# Altium PCB PCB1.PcbDoc
Units mm, origin at the board's own origin, x right, y up, seen from the top; angles counter-clockwise.
Board outline 50 x 50 mm, 2 copper layers (Top Layer, Bottom Layer), stack 1.671 mm thick; 54 components, 28 nets, 163 pads, 81 vias.
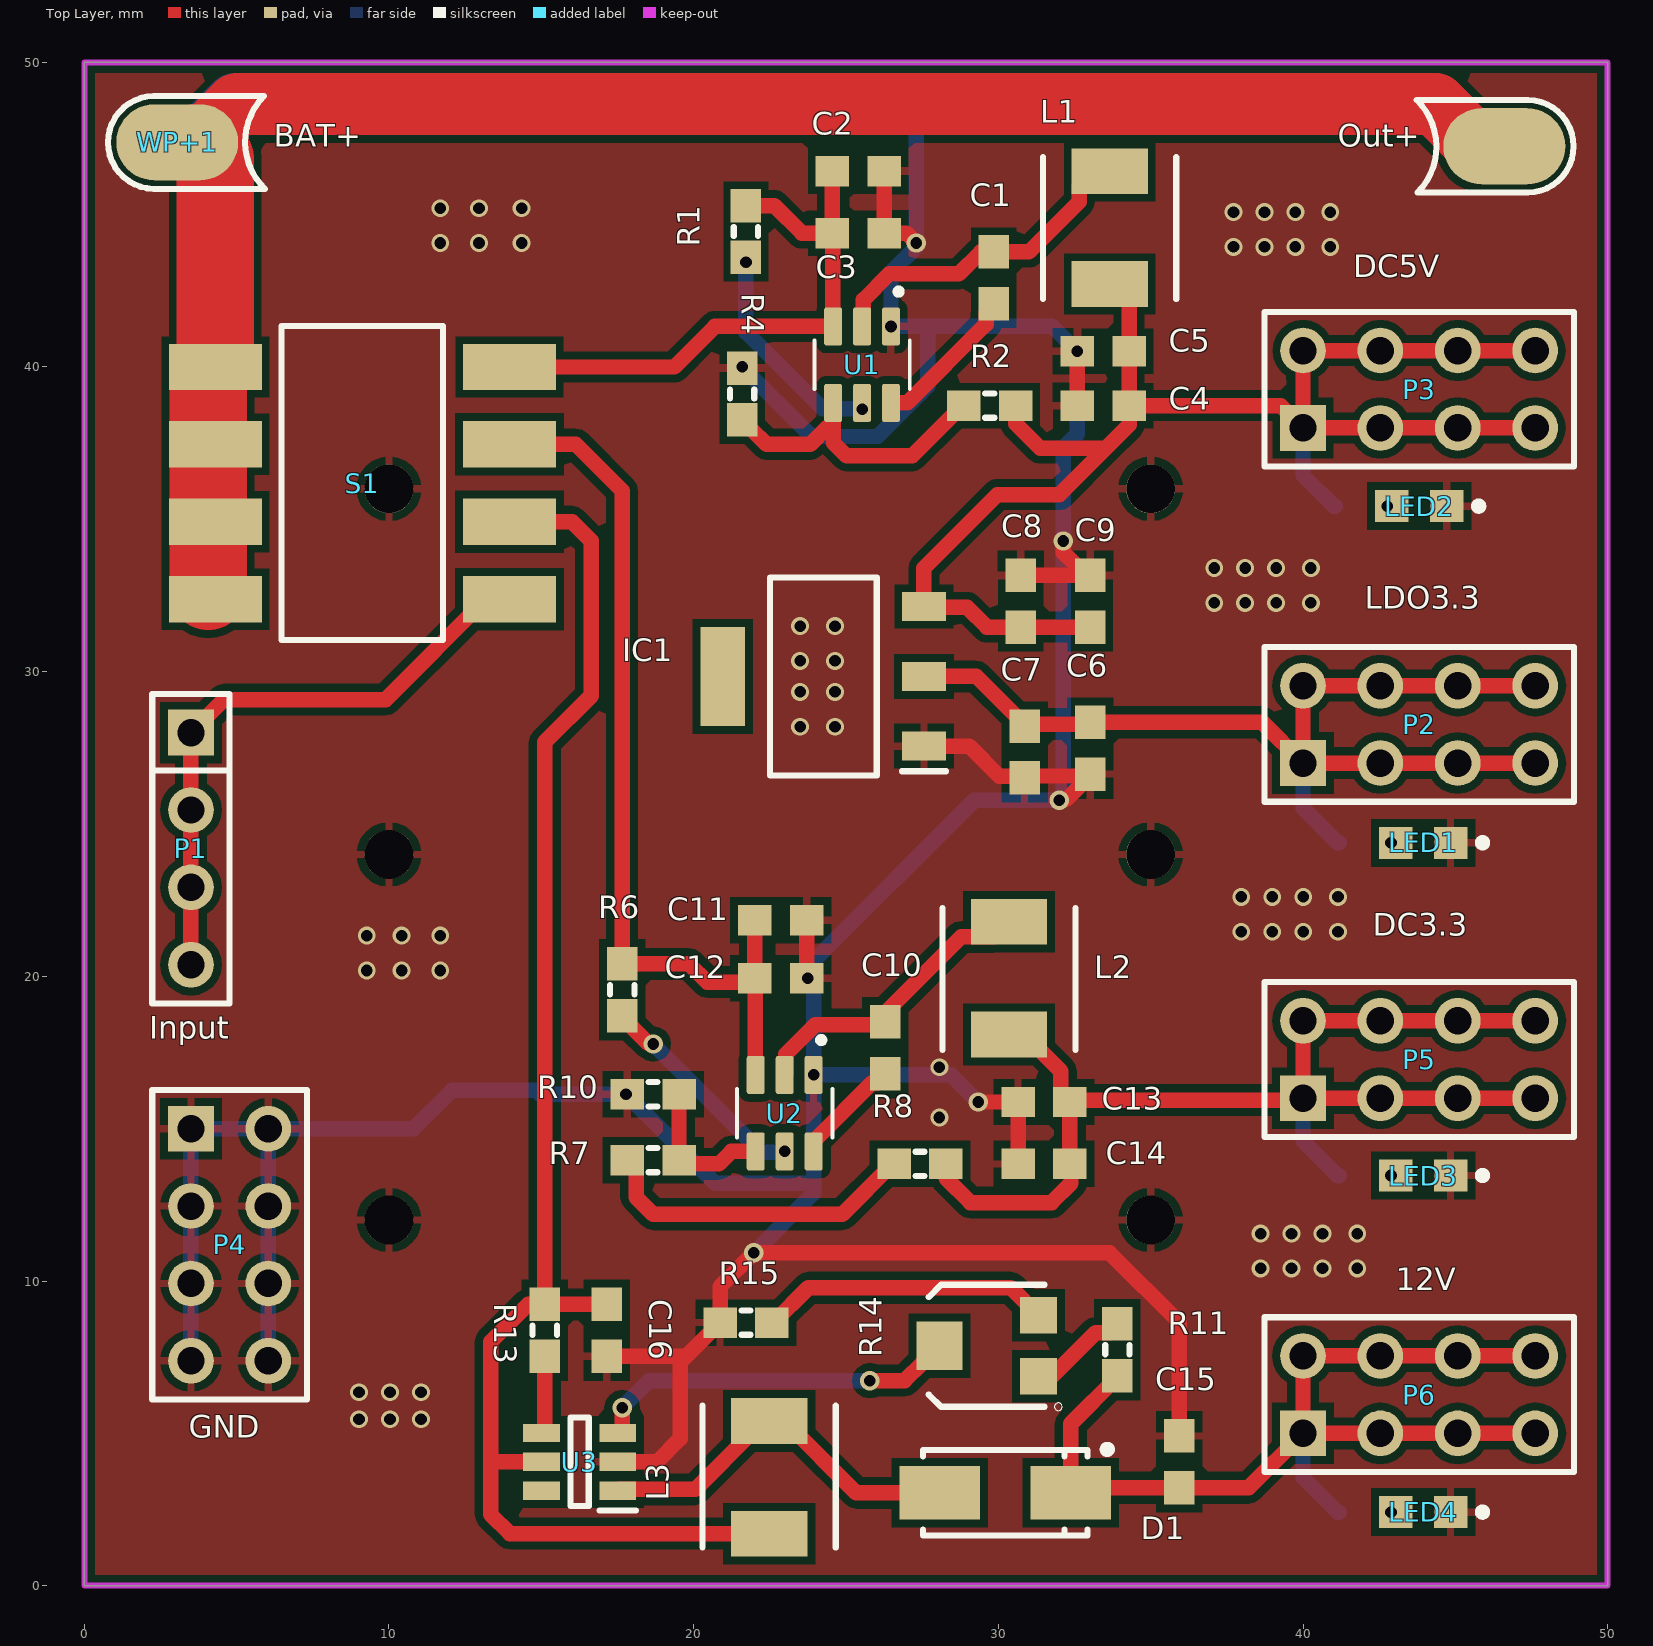
[diagram p0: Top Layer view]
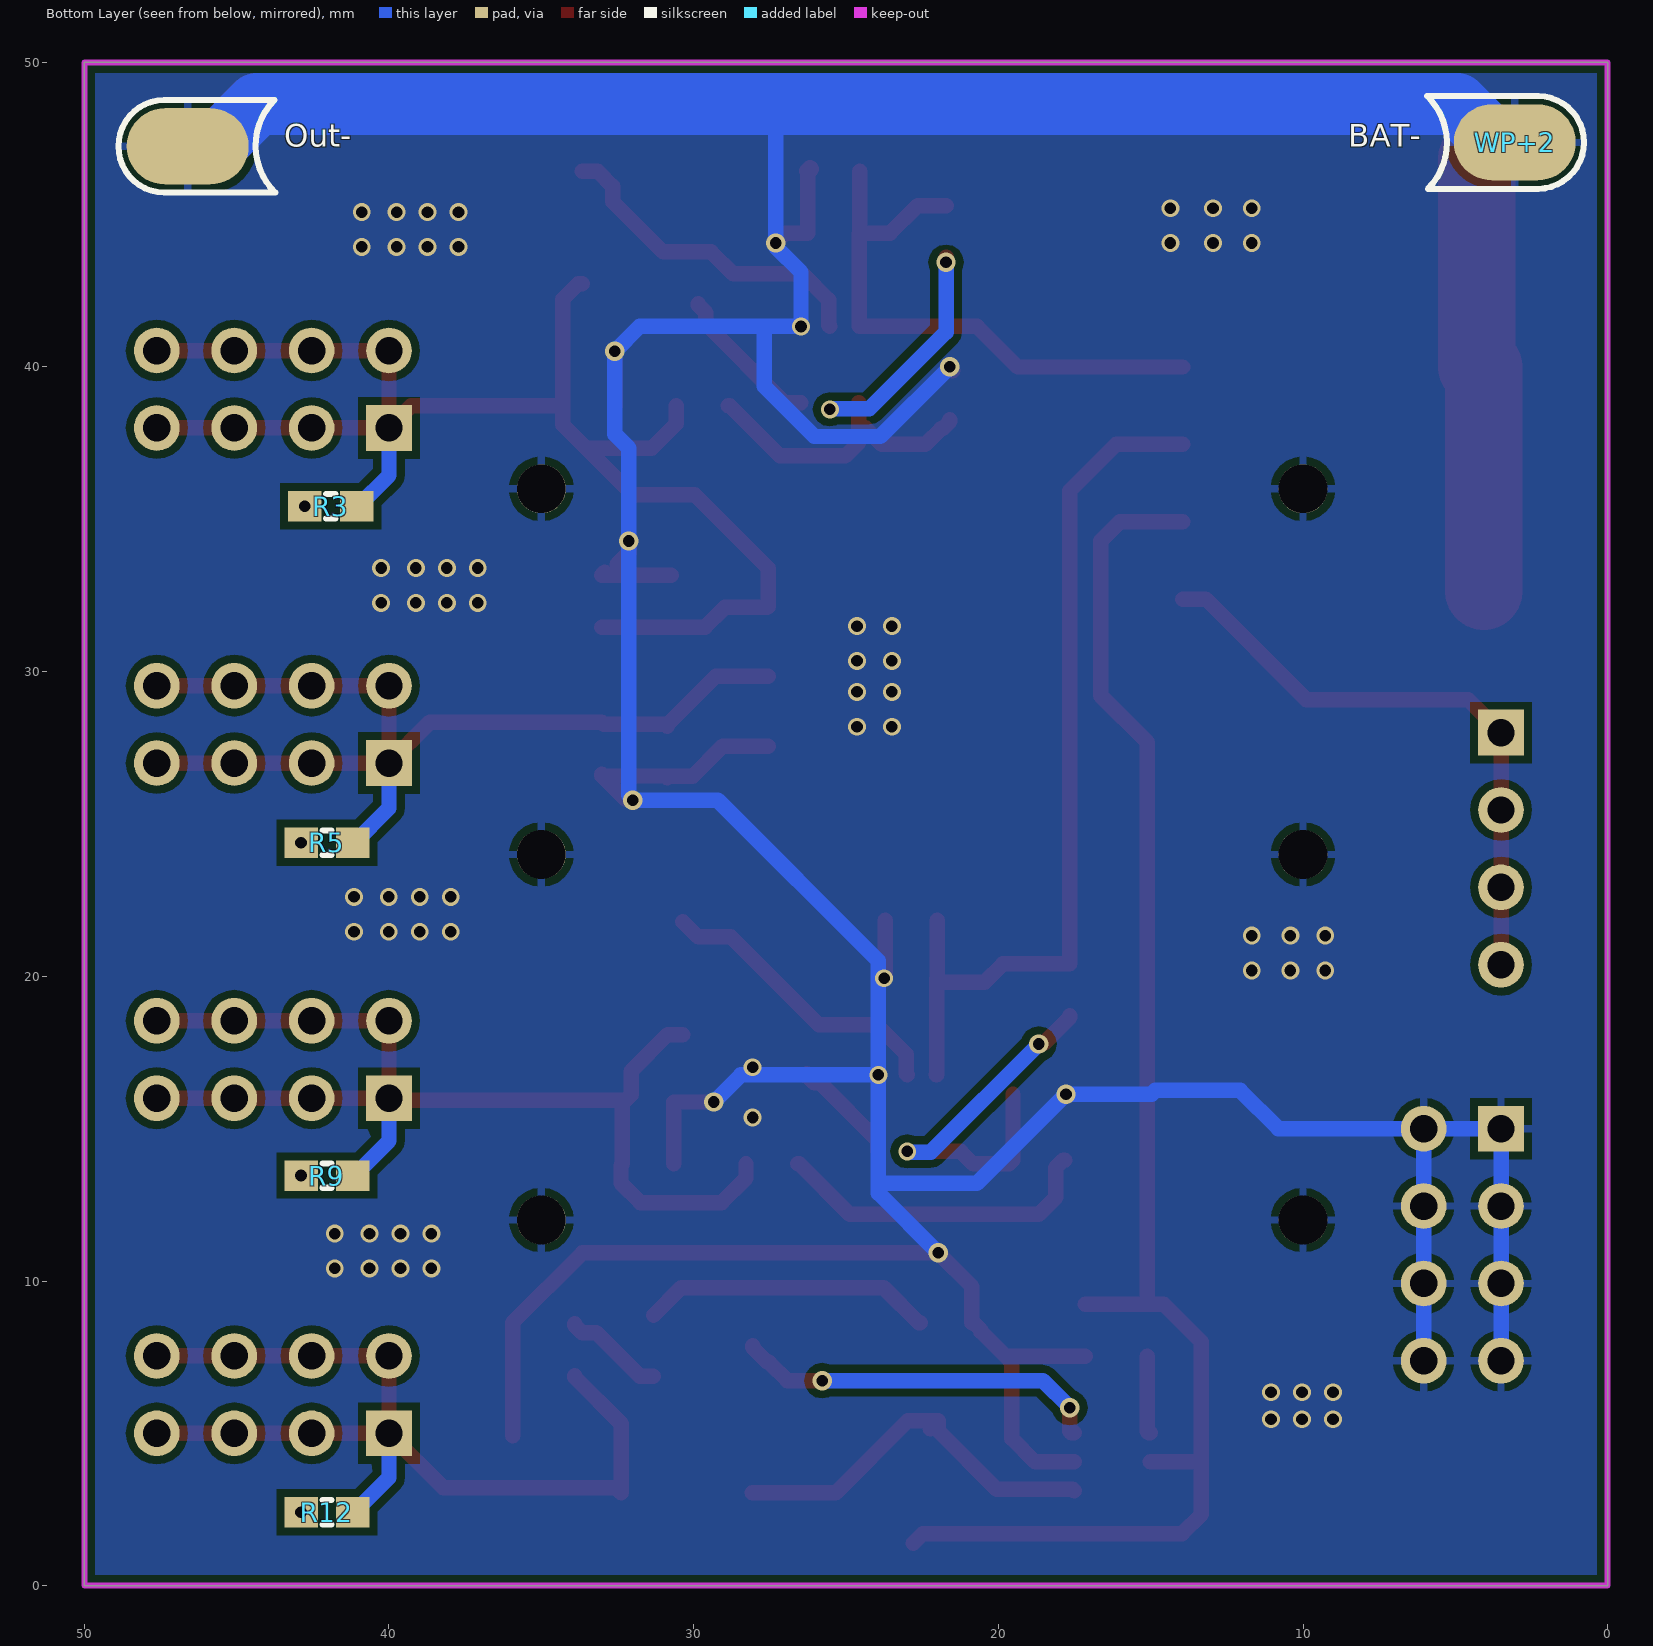
[diagram p1: Bottom Layer view, seen from below]
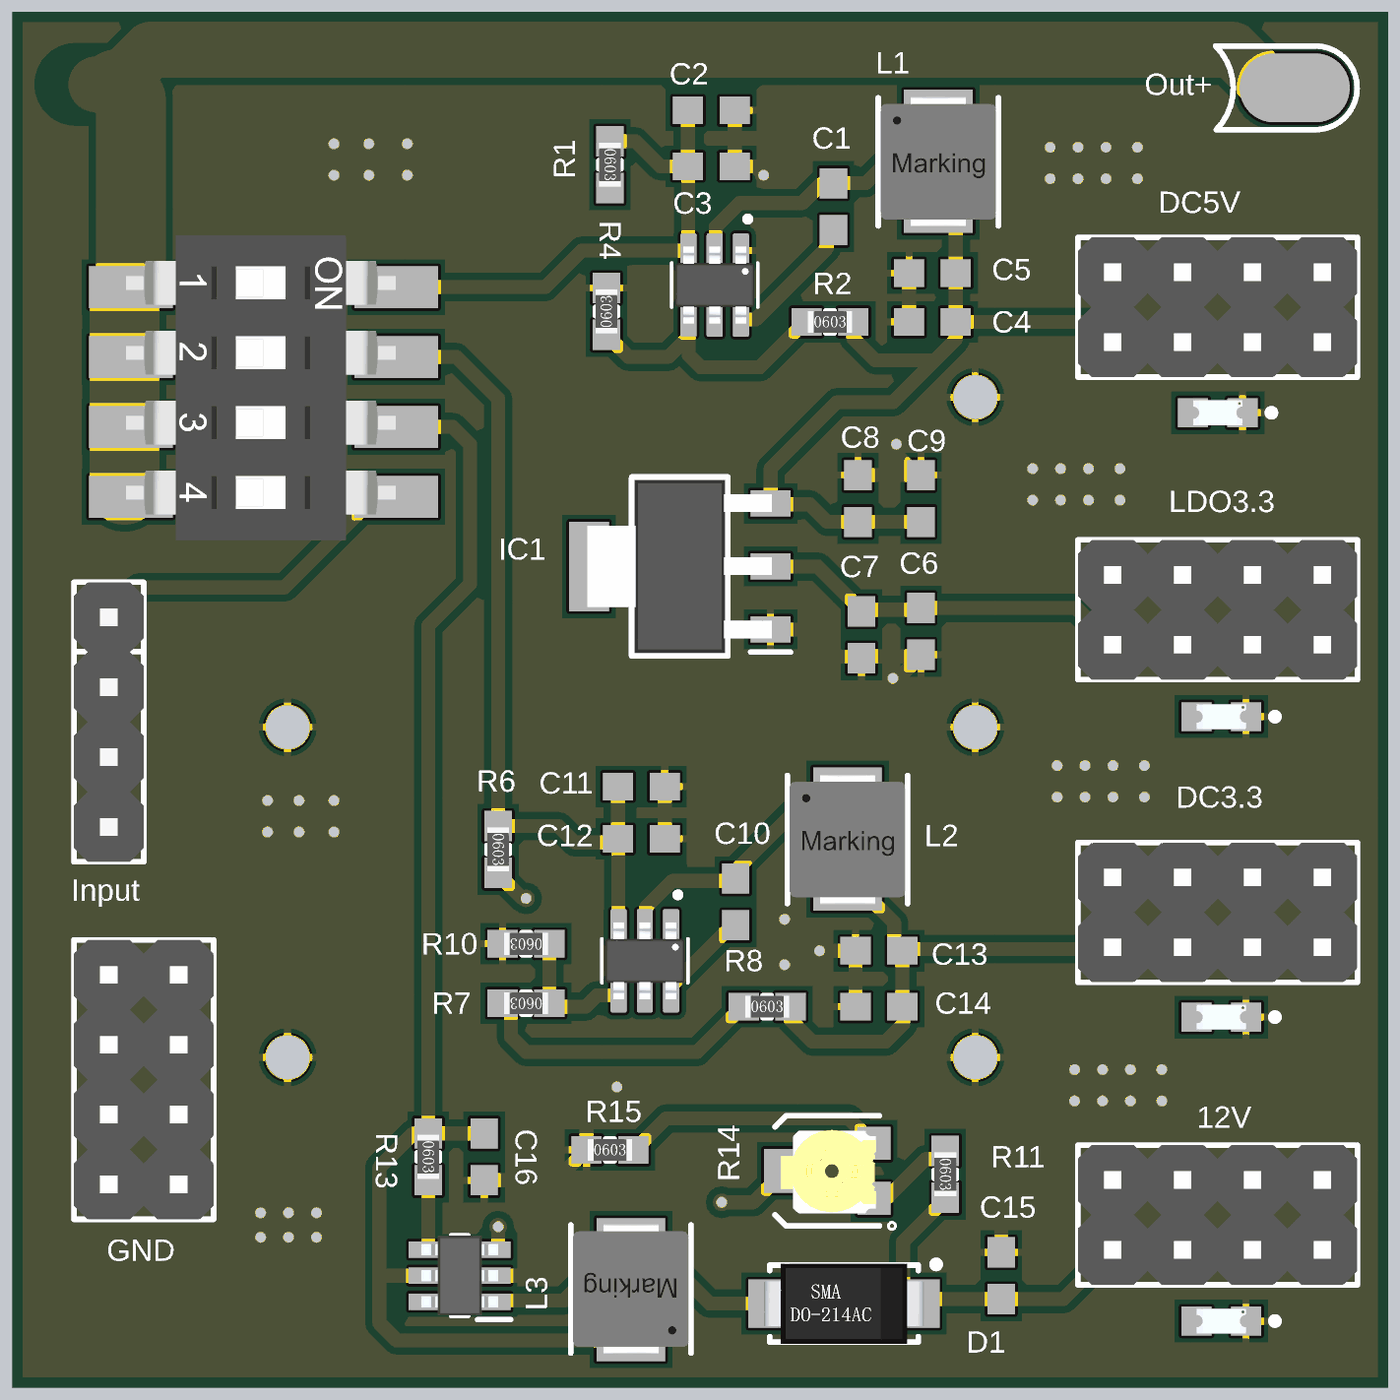
[diagram p2: 3D render of the assembled board from above, using the file's embedded part models]
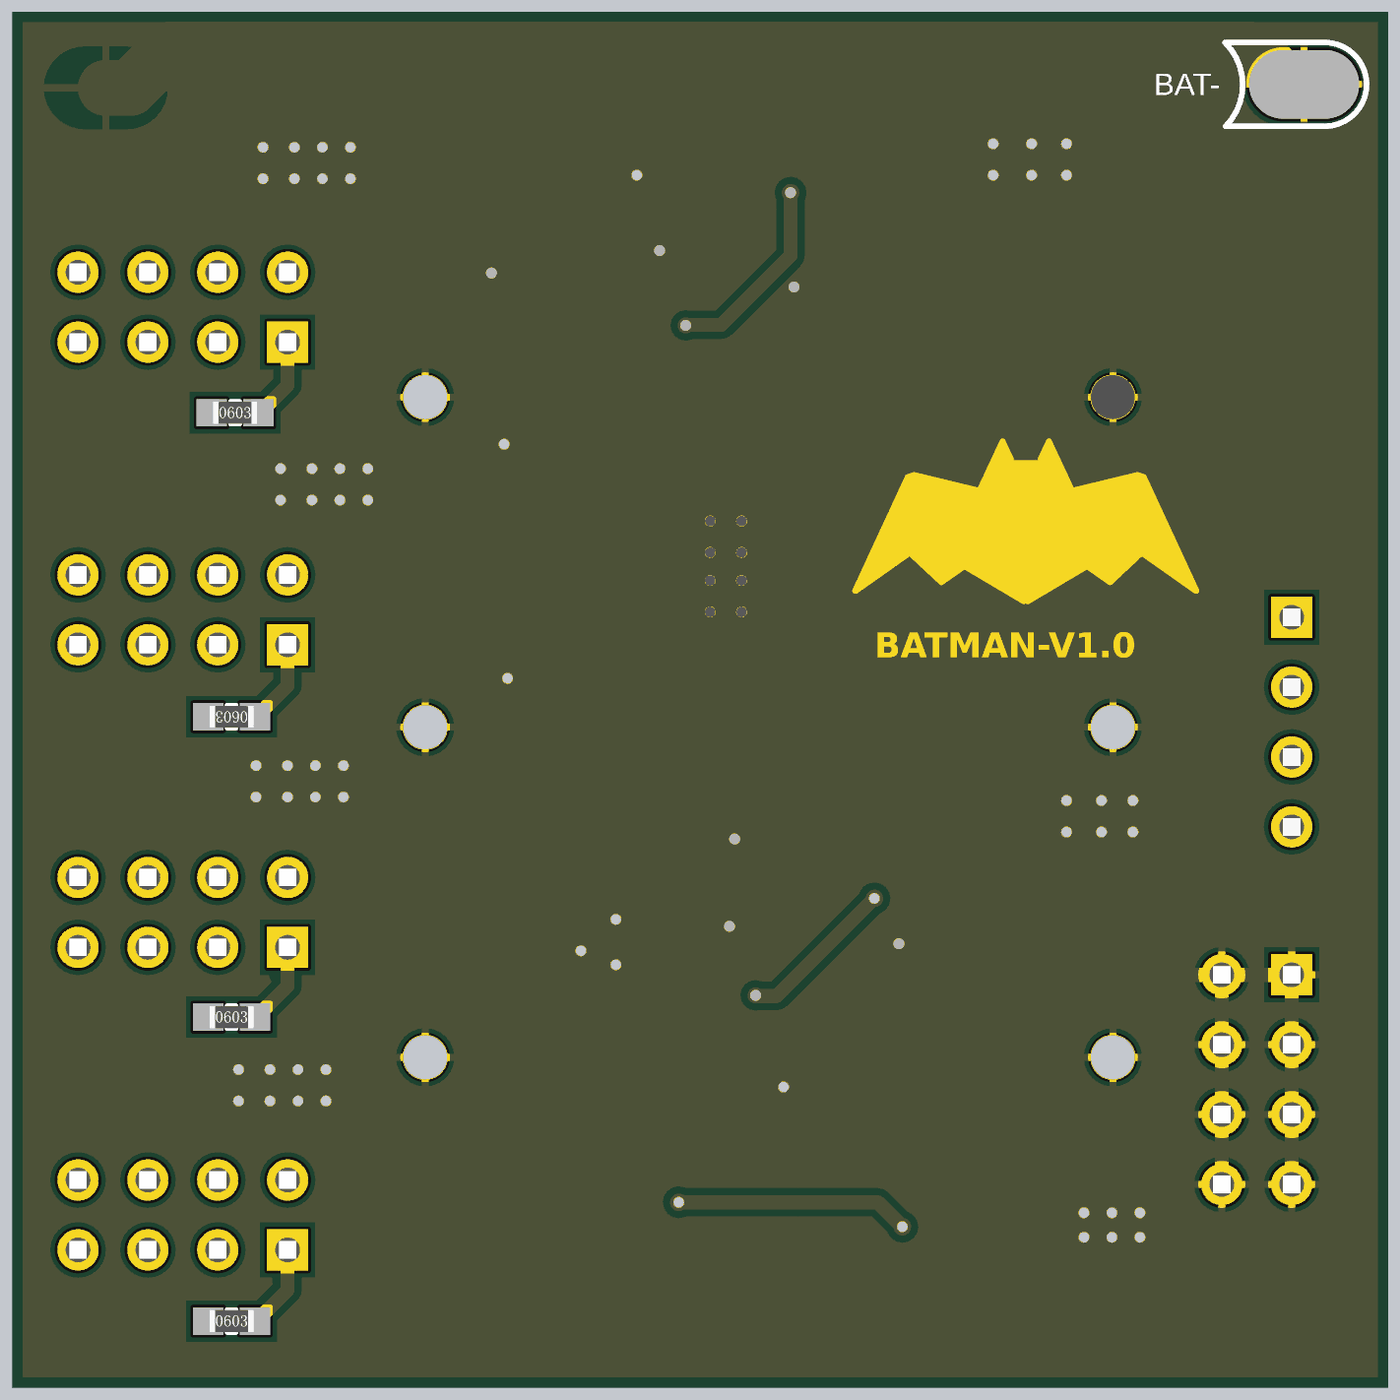
[diagram p3: 3D render of the assembled board from below, using the file's embedded part models]

## Layer stack, top to bottom
Top Solder: solder mask 0.0102, Solder Resist, Dk 3.5
Top Layer: signal copper 0.0356
Dielectric 1: dielectric 1.6, FR-4, Dk 4.8
Bottom Layer: signal copper 0.0356
Bottom Solder: solder mask 0.0102, Solder Resist, Dk 3.5

## Board outline
0,0 0,50 50,50 50,0

## Design rules (kind name [scope] priority, off if disabled: settings)
Clearance [All] p1: gap=0.254 ignorepadtopadclearanceinfootprint=FALSE except(0: Arc-Hole Track-Hole SMDPad-Hole THPad-Hole Via-Hole Fill-Hole Poly-Hole Region-Hole Text-Hole)
PolygonConnect SameVia [IsVia vs IsPoly] p1: connectstyle=Direct reliefconductorwidth=0.254 reliefentries=4 polygonreliefangle="90 Angle" airgapwidth=0.254
PolygonConnect SamePad [IsPad vs IsPoly] p2: connectstyle=Relief reliefconductorwidth=0.254 reliefentries=4 polygonreliefangle="90 Angle" airgapwidth=0.254
PolygonConnect [All] p3: connectstyle=Relief reliefconductorwidth=0.254 reliefentries=4 polygonreliefangle="90 Angle" airgapwidth=0.254
RoutingVias [All] p1: holewidth=0.711 width=1.27 viastyle="Through Hole" minholewidth=0.152 minwidth=0.203 maxholewidth=2.54 maxwidth=2.54
SolderMaskExpansion [All] p1: expansion=0.102
Width [All] p1: maxlimit=2.54 minlimit=0.152 preferedwidth=0.254
30 further rules are at their usual default settings.

## Components (designator, comment, footprint, x,y, rotation, side; value= is the part's Value field where it differs from the comment)
C1 "105" CAPC1608[0603] 29.845,42.926 r90 top
C2 "226" CAPC1608[0603] 25.4,46.425 r0 top
C3 "104" CAPC1608[0603] 25.4,44.393 r0 top
C4 "226" CAPC1608[0603] 33.44,38.735 r180 top
C5 "226" CAPC1608[0603] 33.44,40.513 r180 top
C6 "226" CAPC1608[0603] 33.02,27.489 r90 top
C7 "104" CAPC1608[0603] 30.861,27.362 r90 top
C8 "226" CAPC1608[0603] 30.734,32.315 r90 top
C9 "104" CAPC1608[0603] 33.02,32.315 r90 top
C10 "105" CAPC1608[0603] 26.289,17.653 r90 top
C11 "226" CAPC1608[0603] 22.86,21.844 r0 top
C12 "104" CAPC1608[0603] 22.86,19.939 r0 top
C13 "226" CAPC1608[0603] 31.496,15.875 r180 top
C14 "226" CAPC1608[0603] 31.496,13.843 r180 top
C15 "226" CAPC1608[0603] 35.941,4.064 r90 top
C16 "226" CAPC1608[0603] 17.145,8.382 r270 top
D1 "SS54  5A 40V" SMA[DO-214AC] 30.226,3.048 r0 top
IC1 "AMS1117-3.3" SOT229P700X180-4N 24.257,29.845 r180 top
L1 "6.8uH" WHC0420 33.655,44.577 r90 top value=22uH
L2 "6.8uH" WHC0420 30.353,19.939 r90 top value=22uH
L3 "6.8uH" WHC0420 22.479,3.556 r270 top value=22uH
LED1 "Red" LEDC1608(0603) 43.942,24.384 r180 top locked
LED2 "Red" LEDC1608(0603) 43.815,35.433 r180 top locked
LED3 "Red" LEDC1608(0603) 43.942,13.462 r180 top locked
LED4 "Red" LEDC1608(0603) 43.942,2.413 r180 top locked
Out+ "BAT+" WirePadSingleSide 46.609,19.894 r270 top locked
Out- "BAT-" WirePadSingleSide 46.609,74.594 r90 bottom locked
P1 "Input" HDR1X4 3.5,28 r270 top
P2 "LDO3.3" HDR2X4 40,27 r0 top locked
P3 "DC5V" HDR2X4 40,38 r0 top locked
P4 "GND" HDR2X4 3.5,15 r270 top
P5 "DC3.3" HDR2X4 40,16 r0 top locked
P6 "12V" HDR2X4 40,5 r0 top locked
R1 "100k" RESC1608[0603] 21.717,44.45 r270 top
R2 "43k" RESC1608[0603] 29.718,38.735 r0 top
R3 "620R" RESC1608[0603] 41.91,35.433 r180 bottom
R4 "8.2k" RESC1608[0603] 21.59,39.116 r90 top
R5 "330R" RESC1608[0603] 42.037,24.384 r0 bottom
R6 "100k" RESC1608[0603] 17.653,19.558 r270 top
R7 "24k" RESC1608[0603] 18.669,13.97 r180 top
R8 "1.6k" RESC1608[0603] 27.432,13.843 r0 top
R9 "680R" RESC1608[0603] 42.037,13.462 r180 bottom
R10 "8.2k" RESC1608[0603] 18.669,16.129 r180 top
R11 "120k" RESC1608[0603] 33.909,7.747 r270 top
R12 "1k" RESC1608[0603] 42.037,2.413 r180 bottom
R13 "100k" RESC1608[0603] 15.113,8.382 r270 top
R14 "5.31k/10k" Rhostat2 29.718,7.874 r180 top
R15 "1k" RESC1608[0603] 21.717,8.636 r0 top
S1 "Skey4" Skey4 4.3,40 r0 top
U1 "MP1471" TSOT23-6 25.527,40.075 r270 top
U2 "MP1471" TSOT23-6 22.987,15.509 r270 top
U3 "SX1308" SOT23-6 16.256,4.064 r180 top
WP+1 "BAT+" WirePadSingleSide 3.048,74.721 r90 top locked
WP+2 "BAT-" WirePadSingleSide 3.048,20.021 r270 bottom locked

## Footprints (in the part's own frame and the unit in brackets; to place one, negate y for a bottom-side part, rotate by r counter-clockwise, add the part's x,y. Pads: shape width x height; smd on the part's side, far side on the other; paste and mask are expansions set on the pad)
CAPC1608[0603] [mm] "Chip Capacitor, 2-Leads, Body 1.60x0.80mm, IPC Medium Density"
  rect 1.1x1 smd: 1(-0.85,0) 2(0.85,0)
  body extent -0.88,-0.48 0.87,0.47, height 0.85
HDR1X4 [mm] "Connector; Header; 4 Position"
  rect 1.5x1.5 hole 0.9: 1(0,0)
  round 1.5 hole 0.9: 2(2.54,0) 3(5.08,0) 4(7.62,0)
  silkscreen extent -1.27,-1.27 8.89,1.27, body extent -1.27,-1.27 8.89,1.27, height 8.54
HDR2X4 [mm] "Connector; Header; 4x2 Position"
  rect 1.5x1.5 hole 0.9: 1(0,0)
  round 1.5 hole 0.9: 2(0,2.54) 3(2.54,0) 4(2.54,2.54) 5(5.08,0) 6(5.08,2.54) 7(7.62,0) 8(7.62,2.54)
  silkscreen extent -1.27,-1.27 8.89,3.81, body extent -1.27,-1.27 8.89,3.81, height 8.54
LEDC1608(0603) [mm] "LED,Chip;1.60mm L X 0.80mm W X 0.80mm H"
  rect 1.1x1.05 smd: A(0.9,0) C(-0.9,0)
  silkscreen extent -2.08,-0.12 -1.83,0.12, body extent -0.9,-0.45 0.9,0.45, height 0.8
RESC1608[0603] [mm] "Chip Resistor, 2-Leads, Body 1.60x0.82mm, IPC Medium Density"
  rect 1.1x1 smd: 1(-0.85,0) 2(0.85,0)
  silkscreen extent -0.15,-0.4 0.15,0.4, body extent -0.8,-0.4 0.8,0.4, height 0.45
Rhostat2 [mm]
  rect 1.2x1.2 smd: 1(-1.6,1) 2(-1.6,-1)
  rect 1.5x1.6 smd: 3(1.65,0)
  silkscreen extent -2.38,-2 2,2.13, body extent -1.67,-1.49 1.78,1.54, height 1.55
Skey4 [mil]
  rect 120x60 smd: 1(0,0) 2(0,-100) 3(0,-200) 4(0,-300) 5(380,-300) 6(380,-200) 7(380,-100) 8(380,0)
  silkscreen extent 86,-353 294,53, body extent -7,-363 379,75, height 171
SMA[DO-214AC] [mm] "Molded Diode, 2-Leads, Body 5.00x2.49mm, IPC Medium Density"
  rect 2.65x1.75 smd: A(-2.15,0) K(2.15,0)
  silkscreen extent -2.7,-1.4 3.48,1.55, body extent -2.9,-1.46 2.91,1.46, height 2.3
SOT23-6 [mm]
  rect 1.2x0.6 smd: 1(-1.25,0.95) 2(-1.25,0) 3(-1.25,-0.95) 4(1.25,-0.95) 5(1.25,0) 6(1.25,0.95)
  silkscreen extent -1.85,-1.45 0.3,1.6, body extent -1.4,-1.45 1.4,1.45, height 1.45
SOT229P700X180-4N [mm]
  rect 1.45x0.95 smd: 1(-3.3,2.29) 2(-3.3,0) 3(-3.3,-2.29)
  rect 1.45x3.25 smd: 4(3.3,0)
  silkscreen extent -4.03,-3.25 1.75,3.25, body extent -3.35,-3.15 3.35,3.15, height 1.8
TSOT23-6 [mm]
  rrect25% 1.25x0.59 smd: 1(-1.255,0.95) 2(-1.255,0) 3(-1.255,-0.95) 4(1.255,-0.95) 5(1.255,0) 6(1.255,0.95)
  silkscreen extent -2.5,-1.57 0.8,1.57, body extent -1.4,-1.45 1.4,1.45, height 1
WHC0420 [mm] "4.4mm 4.2mm 2mm"
  rect 1.5x2.5 smd: 1(-1.85,0) 2(1.85,0)
  silkscreen extent -2.35,-2.18 2.31,2.18, body extent -2.37,-2.1 2.33,2.1, height 1.85
WirePadSingleSide [mm] "A single-side pad for soldering wire."
  oval 2.5x4 smd: 1(-27.35,0)
  silkscreen extent -28.87,-2.88 -25.83,2.27

## Part data
C1 C2 C3 C4 C5 C6 C7 C8 C9 C10 C11 C12 C13 C14 C15 C16: library part "Cap Chip 1", "Chip Capacitor, PSpice Model", Tolerance=Y5V, Voltage=3V, Price(RMB)=0.000, Published=8-Jun-2000, Publisher="Altium Limited", Revision="July-2002: Re-released for DXP Platform."
D1: library part "Diode SMx", "Molded Diode", Voltage=5A40V, Imax=500mA, PartNumber="SS54  5A 40V", Price(RMB)=0.000, Published=8-Jun-2000, Publisher="Altium Limited", Revision="July-2002: Re-released for DXP Platform."
IC1: "Integrated Circuit", Manufacturer_Name=Advanced, Datasheet Link=https://datasheet.datasheetarchive.com/originals/distributors/Datasheets-28/DSA-550594.pdf, Height=1.8mm, Manufacturer_Part_Number=AMS1117-3.3
L1 L2 L3: library part L
LED1 LED2 LED3 LED4: library part "LED Chip", "Typical Chip LED", Color=Red, Price(RMB)=0.00, Published=8-Jun-2000, Publisher="Altium Limited", Revision="July-2002: Re-released for DXP Platform."
Out+ Out- WP+1 WP+2: library part "Wire Pad", "Wire soldering pad.", Price(RMB)=0.000
P1: library part "Header 4", "Header, 4-Pin", LatestRevisionDate=17-Jul-2002, LatestRevisionNote="Re-released for DXP Platform.", Price(RMB)=0.00, Publisher="Altium Limited"
P2 P3 P4 P5 P6: library part "Header 4X2", "Header, 4-Pin, Dual row", LatestRevisionDate=17-Jul-2002, LatestRevisionNote="Re-released for DXP Platform.", Price(RMB)=0.00, Publisher="Altium Limited"
R1 R2 R3 R4 R5 R6 R7 R8 R9 R10 R11 R12 R13 R15: library part "Res Chip 2p 1", "Chip Resistor, PSpice Model, IPC PCB Library Drawing", Tolerance=5%, Price(RMB)=0.000, Published=8-Jun-2000, Publisher="Altium Limited", Revision="July-2002: Re-released for DXP Platform.", TC1=0, TC2=0
R14: library part Rhostat
U1 U2: "4.7v-16V Input / 16V3A / 500K"
U3: "boost / 1.2MHz / 2V-24V input / up to 28V Output"

## Free pads (board coordinates)
  round 1.6 hole 1.6: 16(10,12) 16(10,24) 16(10,36) 16(35,12) 16(35,24) 16(35,36)

## Via types
v1: diameter 0.584, hole 0.381, Top Layer to Bottom Layer, tented both sides, 69 vias
v2: diameter 0.635, hole 0.381, Top Layer to Bottom Layer, tented both sides, 12 vias

## Nets (pads, with @x,y where several pads share a name; then routed paths per layer and width w, separated by ;. In a path a pad name is that pad's centre, name@x,y a point inside that pad or via, vN(x,y) a via of type N, cw(c..) or ccw(c..) an arc to the next point about the centre after c; other vN are vias at no path point)
12V: C15.1 D1.K P6.1 P6.2 P6.3 P6.4 P6.5 P6.6 P6.7 P6.8 R11.2 R12.2 | length 33.8
  Top Layer w0.508: R11.2 33.909,6.847 32.376,5.314 D1.K 32.542,3.214 C15.1 38.214,3.214 P6.1 ; P6.7 P6.5 P6.3 P6.1 ; P6.8 P6.6 P6.4 P6.2 P6.1
  Bottom Layer w0.508: P6.1 40,3.55 41.137,2.413 R12.2
12VIn: C16.1 L3.2 R13.1 S1.6 U3.5 | length 50.2
  Top Layer w0.508: S1.6 16.007,34.92 16.637,34.29 16.637,29.21 15.113,27.686 R13.1 ; U3.5 13.404,4.064 13.335,4.133 ; C16.1 R13.1 ; L3.2@22.788,1.397 L3.2 13.97,1.706 13.335,2.341 13.335,4.133 ; 13.335,4.133 13.335,8.001 14.566,9.232 R13.1
+5V: C4.1 C5.1 C8.1 C9.1 IC1.3 L1.1 P3.1 P3.2 P3.3 P3.4 P3.5 P3.6 P3.7 P3.8 R2.2 R3.2 | length 51.4
  Top Layer w0.508: R2.2 30.568,38.139 31.369,37.338 33.528,37.338 ; C9.1 C8.1 29.622,31.465 28.98,32.107 27.585,32.107 IC1.3 27.557,33.399 29.972,35.814 32.004,35.814 33.528,37.338 ; L1.1 33.794,42.727 34.29,42.231 C5.1 C4.1 ; P3.7 P3.5 P3.3 P3.1 ; P3.8 P3.6 P3.4 P3.2 P3.1 ; 33.528,37.338 34.29,38.1 C4.1 ; C4.1 39.265,38.735 P3.1
  Bottom Layer w0.508: P3.1 40,36.443 41.01,35.433 R3.2
DC3.3In: C11.1 C12.1 R6.1 S1.7 U2.3 | length 29.6
  Top Layer w0.508: S1.7 16.134,37.46 17.653,35.941 R6.1 19.851,20.408 20.447,19.812 21.883,19.812 C12.1 ; C11.1 C12.1 ; U2.3 22.023,16.778 22.023,19.925 C12.1
DC3.3V: C13.1 C14.1 L2.1 P5.1 P5.2 P5.3 P5.4 P5.5 P5.6 P5.7 P5.8 R8.2 R9.2 | length 39.8
  Top Layer w0.508: R8.2 28.282,13.374 29.083,12.573 31.75,12.573 32.385,13.208 32.385,13.804 C14.1 C13.1 ; L2.1 30.853,18.089 32.05,16.892 32.05,16.121 32.296,15.875 C13.1 ; P5.7 P5.5 P5.3 P5.1 ; P5.8 P5.6 P5.4 P5.2 P5.1 ; C13.1 32.409,15.938 39.937,15.938 P5.1
  Bottom Layer w0.508: P5.1 40,14.599 41.137,13.462 R9.2
DC5VIn: C2.1 C3.1 R1.1 S1.8 U1.3 | length 19.5
  Top Layer w0.508: S1.8 19.367,40 20.697,41.33 24.55,41.33 24.563,41.343 24.563,44.379 C3.1 ; R1.1 22.645,45.3 23.552,44.393 C3.1 ; C2.1 C3.1
GND: C2.2 C3.2 C4.2 C5.2 C6.1 C7.1 C8.2 C9.2 C11.2 C12.2 C13.2 C14.2 C15.2 C16.2 IC1.1 LED1.C LED2.C LED3.C LED4.C Out-.1 P4.1 P4.2 P4.3 P4.4 P4.5 P4.6 P4.7 P4.8 pad.16 R4.2 R10.2 R15.1 U1.1 U2.1 U3.2 WP+2.1 | length 199.5
  Top Layer w0.508: C16.2 19.763,7.532 ; U3.2 18.796,4.064 19.558,4.826 19.558,7.327 19.763,7.532 ; v2(17.78,16.129) R10.2 ; R4.2@21.502,39.878 R4.2 ; C12.2 C11.2 ; C2.2 C3.2 26.981,44.393 v2(27.305,44.069) ; IC1.1 29.044,27.555 30.037,26.562 30.861,26.562 C7.1 30.925,26.575 32.957,26.575 C6.1 33.02,26.589 32.236,25.805 32.028,25.805 v2(32.004,25.781) ; v2(29.337,15.875) C13.2 C14.2 ; C8.2 C9.2 C9.2@32.917,33.268 ; v2(32.131,34.29) 32.131,33.909 32.512,33.528 ; C4.2 v2(32.59,40.513) ; C15.2 35.941,8.636 33.655,10.922 v2(21.971,10.922) 20.867,9.818 R15.1 20.817,8.636 20.571,8.39 20.571,8.34 19.763,7.532
  Top Layer w0.584: C2.2@26.172,46.503 C2.2
  Bottom Layer w0.508: P4.7 P4.5 P4.3 P4.1 P4.2 ; P4.8 P4.6 P4.4 P4.2 ; v2(21.59,40.005) 23.876,37.719 26.035,37.719 27.686,39.37 27.686,41.33 ; v2(21.971,10.922) 23.937,12.888 23.937,13.335 ; 27.305,48.63 v2(27.305,44.069) 27.305,43.942 26.477,43.114 v1(26.477,41.33) 27.686,41.33 ; v2(29.337,15.875) 28.448,16.764 v1(23.937,16.764) ; P4.2 10.809,15 12.065,16.256 14.842,16.256 14.969,16.129 v2(17.78,16.129) 20.701,13.208 23.81,13.208 23.937,13.335 ; 23.937,13.335 v1(23.937,16.764) ; v1(23.937,16.764) 23.937,20.508 29.21,25.781 v2(32.004,25.781) 32.004,25.815 32.131,25.942 v2(32.131,34.29) 32.131,37.338 32.59,37.797 v2(32.59,40.513) 31.773,41.33 27.686,41.33
  Bottom Layer w0.584: WP+2.1 WP+2.1@3.175,47.498
  Bottom Layer w2.032: WP+2.1 3.683,47.371 4.942,48.63 27.305,48.63 44.334,48.63 45.72,47.244 Out-.1
  other v1: 9.017,5.461 10.033,5.461 11.049,5.461 9.017,6.35 10.033,6.35 11.049,6.35 38.608,10.414 39.624,10.414 40.64,10.414 41.783,10.414 38.608,11.557 39.624,11.557 40.64,11.557 41.783,11.557 28.067,15.367 28.067,17.018 23.749,19.939 9.271,20.193 10.414,20.193 11.684,20.193 9.271,21.336 10.414,21.336 11.684,21.336 37.973,21.463 38.989,21.463 40.005,21.463 41.148,21.463 37.973,22.606 38.989,22.606 40.005,22.606 41.148,22.606 23.495,28.194 24.638,28.194 23.495,29.337 24.638,29.337 23.495,30.353 24.638,30.353 23.495,31.496 24.638,31.496 37.084,32.258 38.1,32.258 39.116,32.258 40.259,32.258 37.084,33.401 38.1,33.401 39.116,33.401 40.259,33.401 37.719,43.942 38.735,43.942 39.751,43.942 40.894,43.942 11.684,44.069 12.954,44.069 14.351,44.069 37.719,45.085 38.735,45.085 39.751,45.085 40.894,45.085 11.684,45.212 12.954,45.212 14.351,45.212
LDO3.3V: C6.2 C7.2 IC1.2 P2.1 P2.2 P2.3 P2.4 P2.5 P2.6 P2.7 P2.8 R5.1 | length 34.7
  Top Layer w0.508: IC1.2 29.278,29.845 30.861,28.262 C7.2 30.925,28.275 32.957,28.275 C6.2 38.661,28.339 P2.1 ; P2.7 P2.5 P2.3 P2.1 ; P2.8 P2.6 P2.4 P2.2 P2.1
  Bottom Layer w0.508: P2.1 40,25.521 41.137,24.384 R5.1
NetC1_1: C1.1 U1.6 | length 5
  Top Layer w0.508: U1.6 27.009,38.82 29.599,41.41 29.599,41.78 29.845,42.026 C1.1
NetC10_1: C10.1 U2.6 | length 3.6
  Top Layer w0.508: U2.6 23.937,14.584 25.86,16.507 26.043,16.507 26.289,16.753 C10.1
NetC10_2: C10.2 L2.2 U2.2 | length 9.8
  Top Layer w0.508: U2.2 23.028,16.805 23.028,17.45 23.993,18.415 25.897,18.415 26.226,18.743 28.775,21.293 29.857,21.293 L2.2
NetLED1_A: LED1.A R5.2
  other v1: 42.887,24.384
NetLED2_A: LED2.A R3.1
  other v1: 42.76,35.433
NetLED3_A: LED3.A R9.1
  other v1: 42.887,13.462
NetLED4_A: LED4.A R12.1
  other v1: 42.887,2.413
NetR1_2: R1.2 U1.5 | length 7.3
  Top Layer w0.508: v2(21.717,43.434) R1.2
  Bottom Layer w0.508: v2(21.717,43.434) 21.717,41.148 24.233,38.632 25.503,38.632 v1(25.527,38.608)
NetR6_2: R6.2 U2.5 | length 7.2
  Top Layer w0.508: R6.2 17.653,18.658 18.507,17.804 18.645,17.804 v2(18.669,17.78)
  Bottom Layer w0.508: v2(18.669,17.78) 22.219,14.23 22.963,14.23 v1(22.987,14.254)
NetR7_1: R7.1 R10.1 U2.4 | length 4.9
  Top Layer w0.508: R10.1 R7.1 19.646,13.843 20.828,13.843 21.239,14.254 U2.4
NetR7_2: R7.2 R8.1 | length 10.8
  Top Layer w0.508: R7.2 17.869,13.97 18.115,13.724 18.115,12.746 18.669,12.192 24.881,12.192 26.532,13.843 R8.1
NetR11_1: R11.1 R14.1 | length 3.3
  Top Layer w0.508: R14.1 31.766,6.874 33.193,8.301 33.663,8.301 33.909,8.547 R11.1
NetR13_2: R13.2 U3.4 | length 2.6
  Top Layer w0.508: U3.4 15.067,5.014 15.113,5.06 R13.2
NetR14_2: R14.2 R15.2 | length 9.6
  Top Layer w0.508: R15.2 22.617,8.636 23.76,9.779 30.413,9.779 R14.2
Power+: Out+.1 S1.1 S1.2 S1.3 S1.4 WP+1.1 | length 60
  Top Layer w0.762: S1.4@4.064,32.634 4.318,32.38 S1.4
  Top Layer w2.032: WP+1.1 3.758,47.371 5.017,48.63 44.346,48.63 45.732,47.244 Out+.1
  Top Layer w2.54: WP+1.1@3.758,47.371 4.3,46.829 S1.1 ; S1.4@4.064,32.634 S1.1@4.064,40
Power+In: P1.1 P1.2 P1.3 P1.4 S1.5 | length 19.9
  Top Layer w0.508: P1.4 P1.3 P1.2 P1.1 4.583,29.083 9.893,29.083 13.19,32.38 S1.5
U1_FB: R2.1 R4.1 U1.4 | length 10
  Top Layer w0.508: R4.1 21.59,38.216 21.836,37.97 21.886,37.97 22.391,37.465 23.832,37.465 24.375,38.008 24.577,38.008 ; U1.4 24.577,38.008 ; R2.1 28.818,38.735 27.167,37.084 25.019,37.084 24.577,37.526 24.577,38.008
U1_SW: C1.2 L1.2 U1.2 | length 11
  Top Layer w0.508: U1.2 25.568,41.371 25.568,42.205 26.416,43.053 28.702,43.053 29.425,43.776 C1.2 31.004,43.776 32.659,45.431 32.659,45.931 33.155,46.427 L1.2
U3_FB: R14.3 U3.3 | length 12.2
  Top Layer w0.508: U3.3 17.607,5.014 17.653,5.06 v2(17.653,5.842) ; v2(25.781,6.731) 26.925,6.731 27.522,7.328 27.572,7.328 28.068,7.824 R14.3
  Bottom Layer w0.508: v2(17.653,5.842) 18.542,6.731 v2(25.781,6.731)
U3_SW: D1.A L3.1 U3.1 | length 13
  Top Layer w0.508: U3.1 17.552,3.16 20.051,3.16 21.979,5.088 L3.1@21.979,5.406 ; L3.1@22.229,5.156 L3.1@21.979,5.406 ; D1.A 25.337,3.048 22.979,5.406 L3.1 L3.1@21.979,5.406
pads on no net: IC1.4 U3.6

## Polygon pours and split planes (outlines as drawn)
GND on Bottom Layer "Bottom Layer-GND" (solid, remove dead copper, pour order 6): 0,0 50,0 50,50 0,50 0,0
no net on Bottom Layer "Bottom Layer-No Net" (solid, remove dead copper, pour order 2): 15.875,43.942
GND on Top Layer "Top Layer-GND" (solid, remove dead copper, pour order 8): 50,0 50,50 0,50 0,0

## Keep-outs
Keep-Out Layer:
  the board outline again, w0.2

## Silkscreen, mask and mechanical layers (free items; w line width, h text height)
Bottom Solder:
  drawing of 23 lines, arcs and shapes, not listed
  text "BATMAN-V1.0" at 18.669,26.543 h1.78